# Altium PCB MicroCurrent.PcbDoc
Units mm, origin at the board's own origin, x right, y up, seen from the top; angles counter-clockwise.
Board outline 50 x 80 mm, 2 copper layers (Top, Bot); 36 components, 21 nets, 125 pads, 15 vias.
Unrouted connection lines stored in the file: 10.
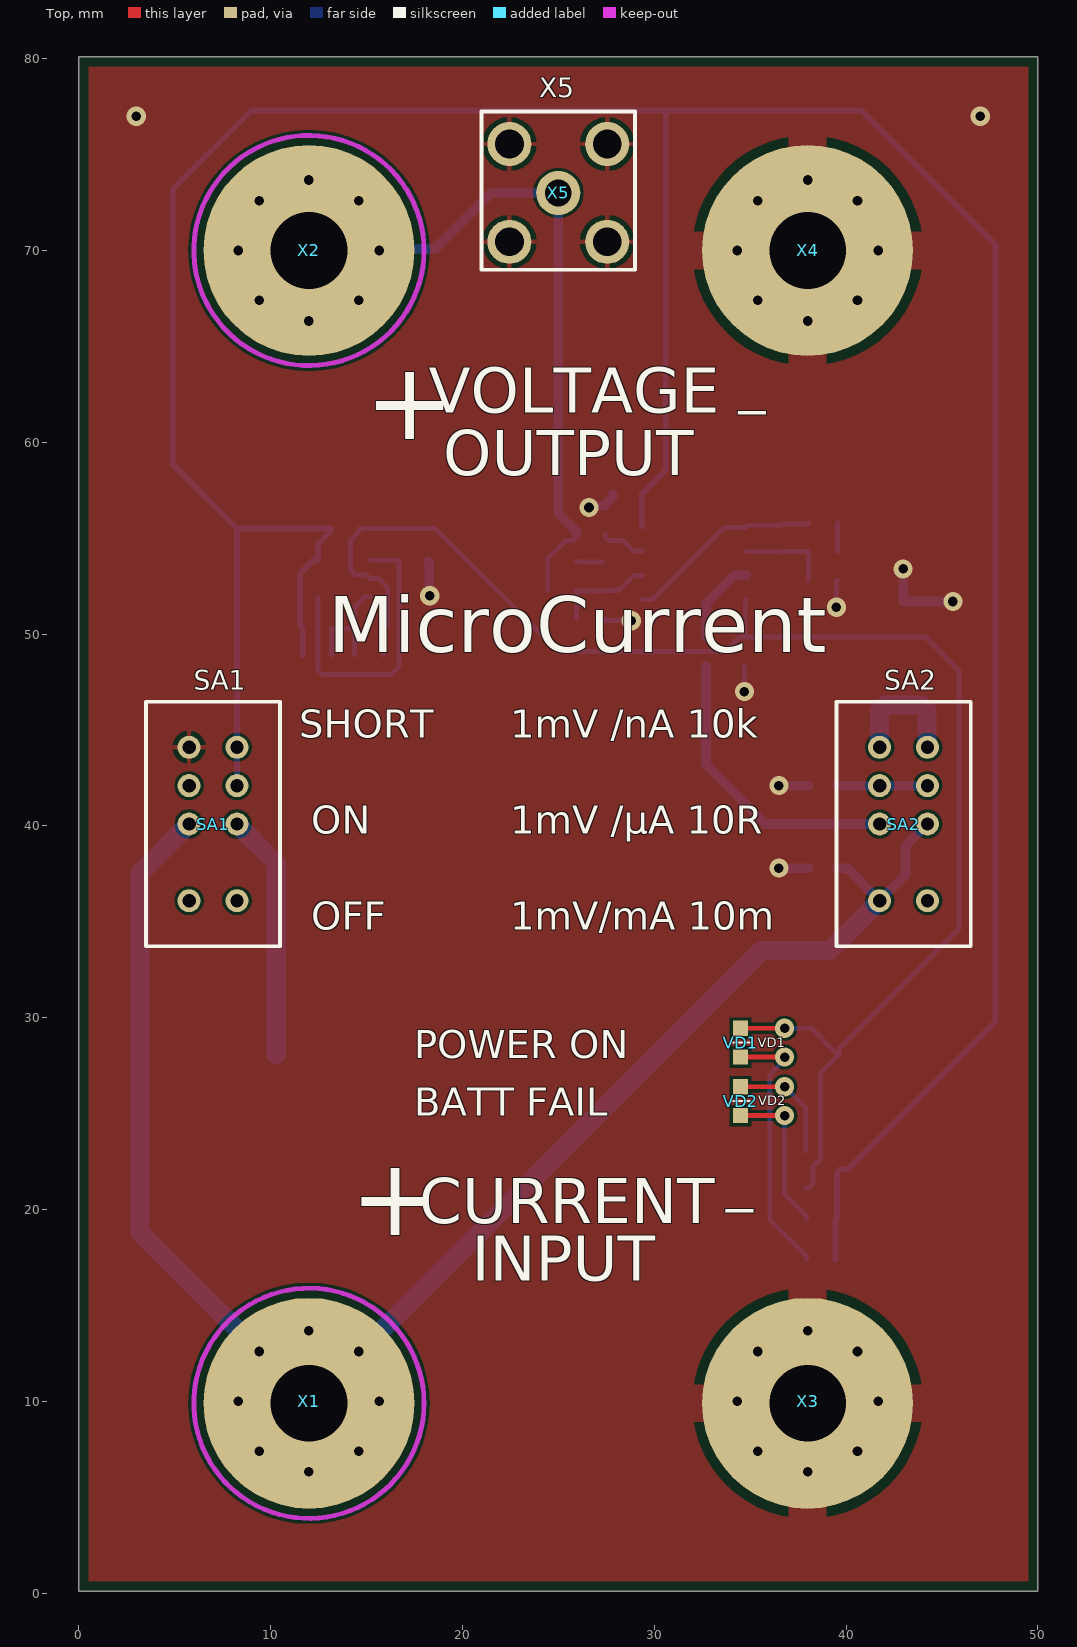
[diagram p0: Top view]
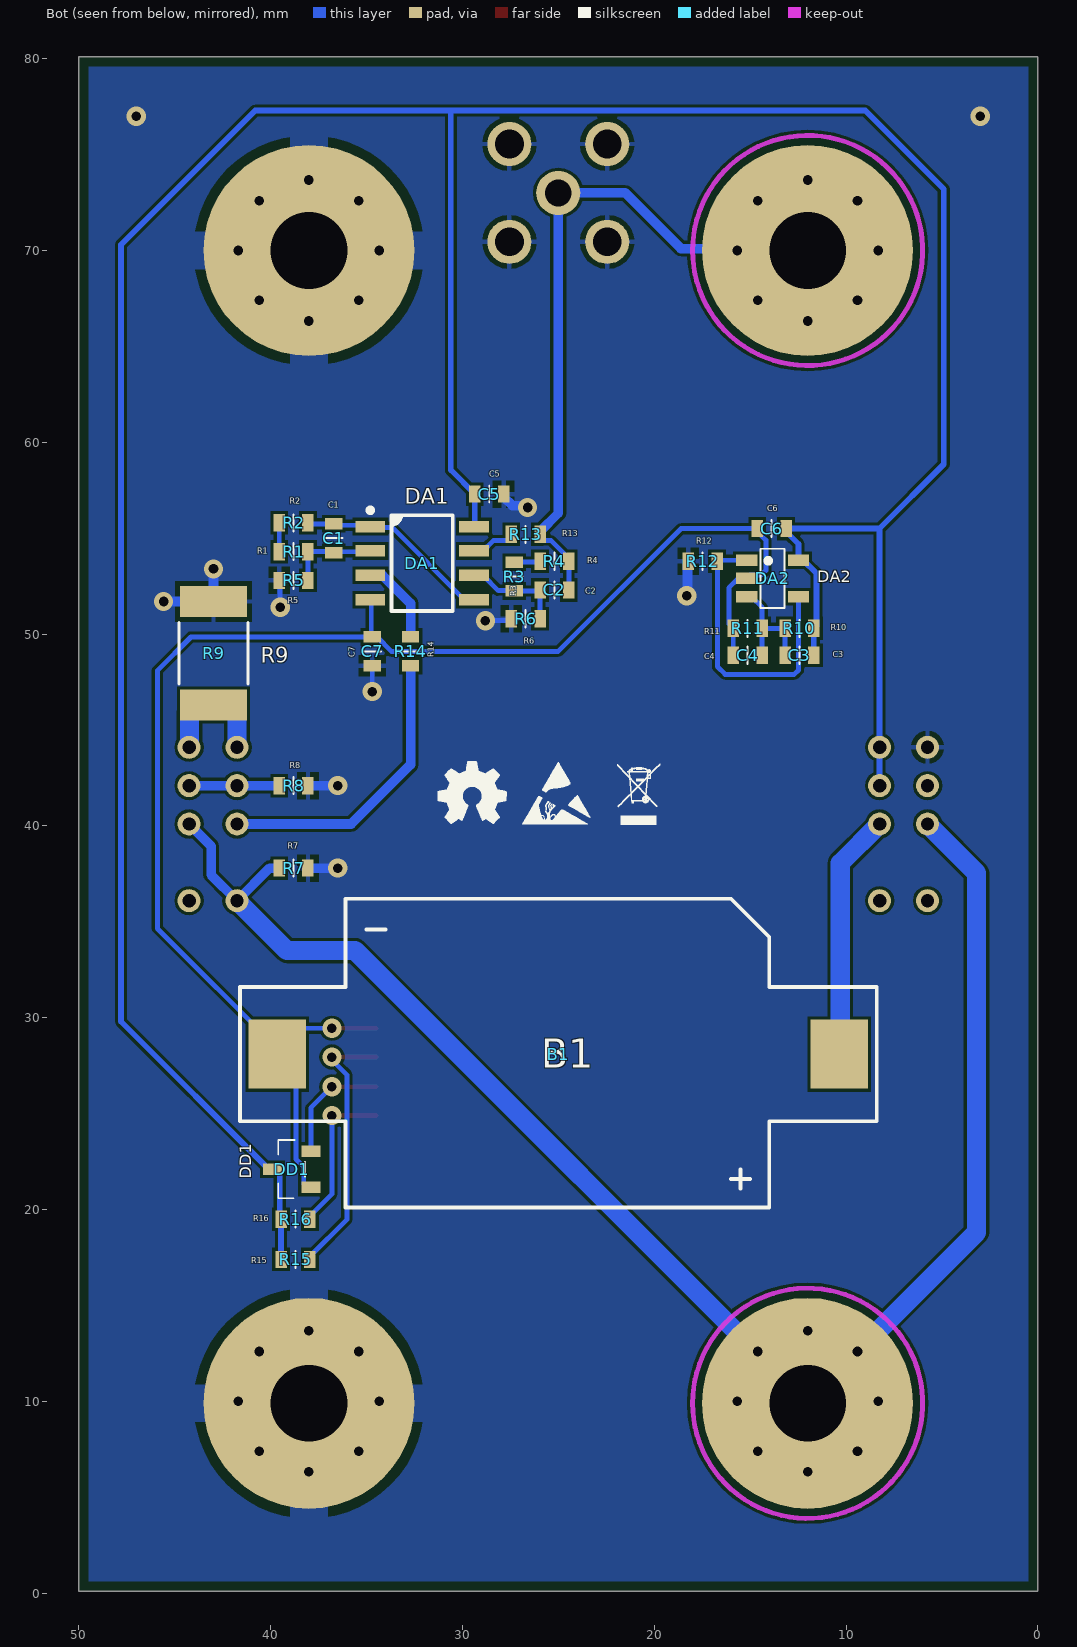
[diagram p1: Bot view, seen from below]
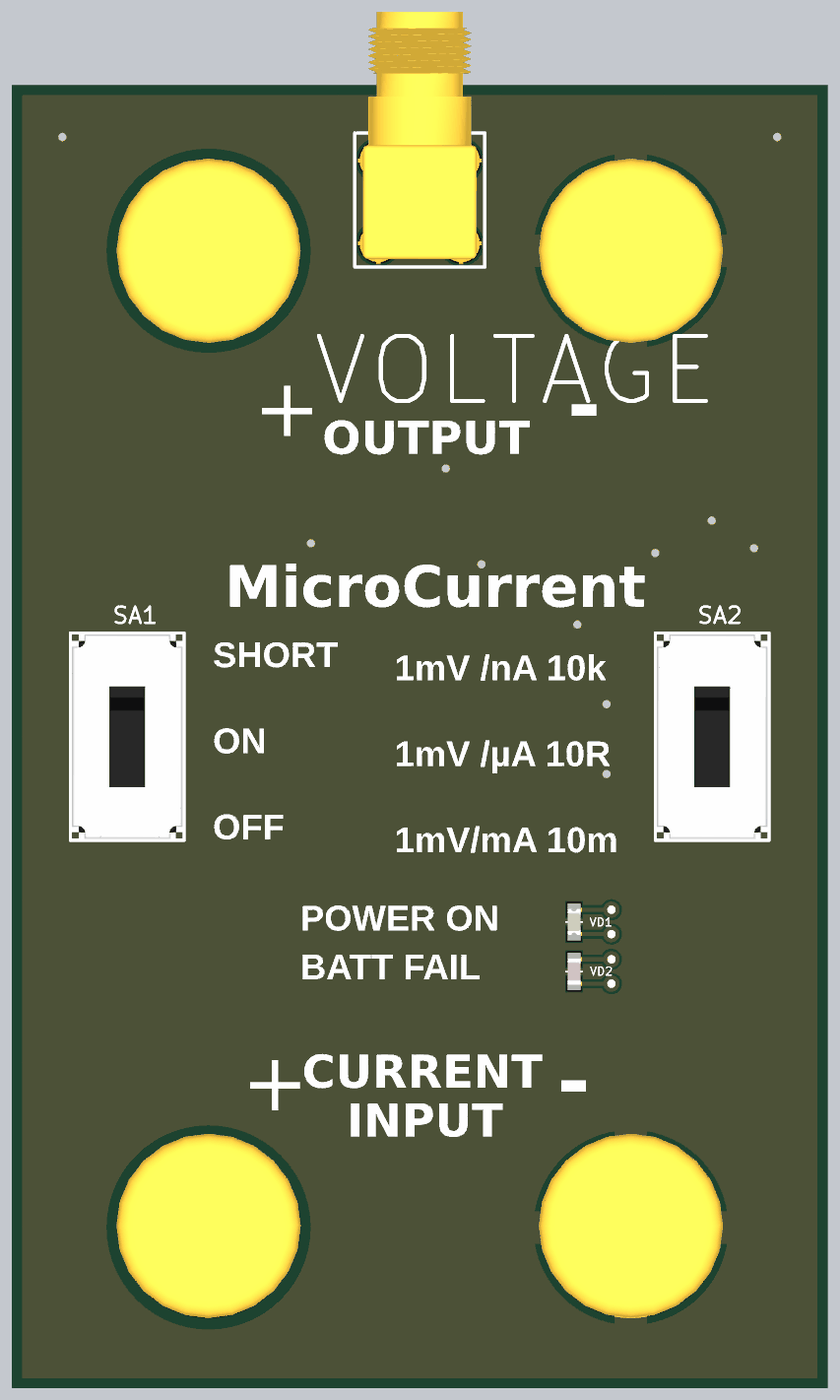
[diagram p2: 3D render of the assembled board from above, using the file's embedded part models]
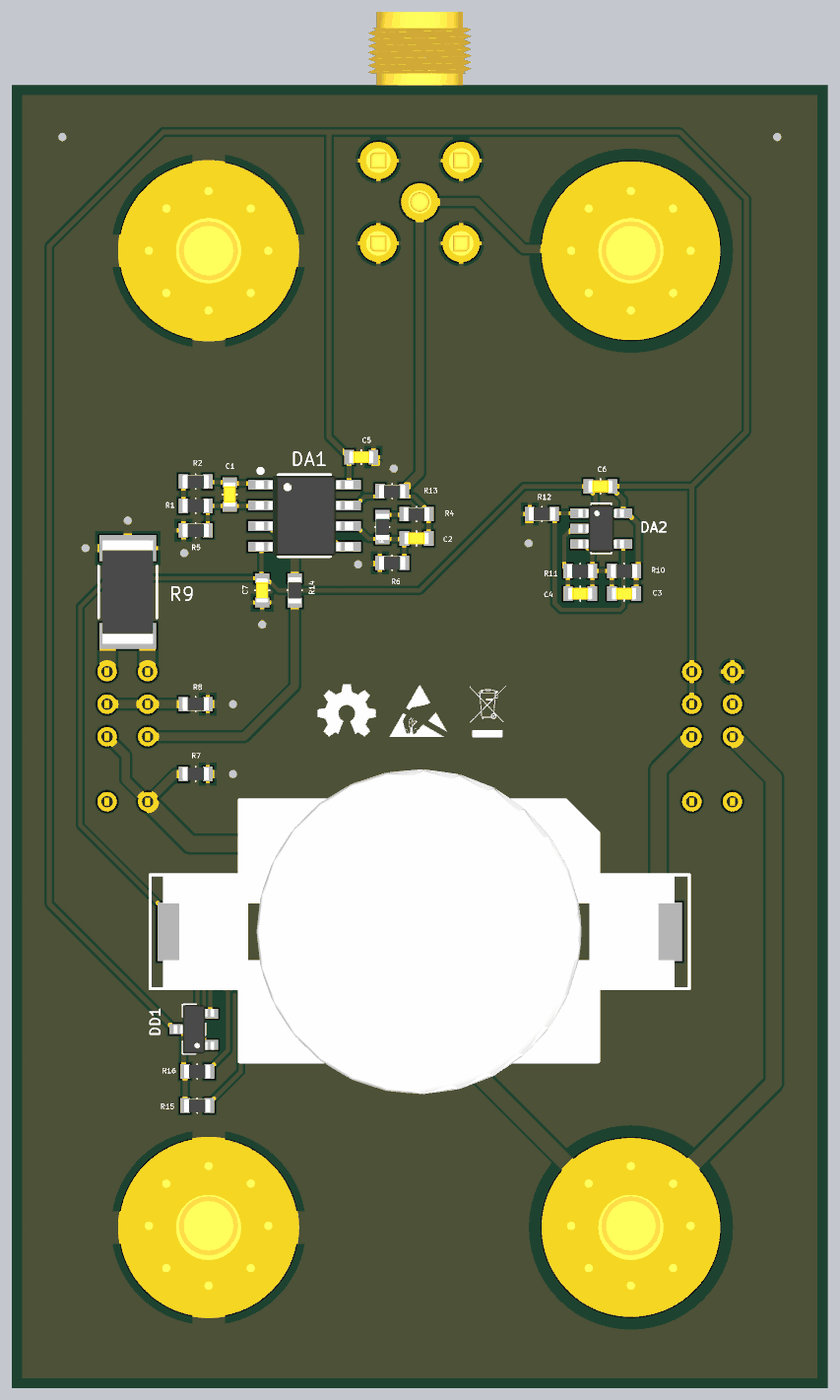
[diagram p3: 3D render of the assembled board from below, using the file's embedded part models]

## Layer stack, top to bottom
Top Solder: solder mask 0.0102, Solder Resist, Dk 3.5
Top: signal copper 0.0356
Dielectric 1: dielectric 0.32, FR-4, Dk 4.8
Bot: signal copper 0.0356
Bottom Solder: solder mask 0.0102, Solder Resist, Dk 3.5

## Board outline
0,0.1 0,80.1 50,80.1 50,0.1

## Design rules (kind name [scope] priority, off if disabled: settings)
BoardOutlineClearance [All] p1: gap=0.5 ignorepadtopadclearanceinfootprint=FALSE
Clearance ClearanceSilk [OnLayer('Top Silk') vs OnLayer('L1')] p1 off: gap=0.15 ignorepadtopadclearanceinfootprint=FALSE except(0: Arc-Hole Track-Hole SMDPad-Hole THPad-Hole Via-Hole Fill-Hole Poly-Hole Region-Hole Text-Hole)
Clearance Clearance_TOP&BOT_Layers [OnTopLayer Or OnBottomLayer] p2: gap=0.15 ignorepadtopadclearanceinfootprint=FALSE except(0: Arc-Hole Track-Hole SMDPad-Hole THPad-Hole Via-Hole Fill-Hole Poly-Hole Region-Hole Text-Hole)
Clearance Clearance_INT_Layers [(Not OnTopLayer) And (Not OnBottomLayer)] p3: gap=0.15 ignorepadtopadclearanceinfootprint=FALSE except(0: Arc-Hole Track-Hole SMDPad-Hole THPad-Hole Via-Hole Fill-Hole Poly-Hole Region-Hole Text-Hole)
Clearance ClearancePatds [InNet('In')] p4 off: gap=1 ignorepadtopadclearanceinfootprint=FALSE
Clearance [All] p5: gap=0.254 ignorepadtopadclearanceinfootprint=FALSE except(0: Arc-Hole Track-Hole SMDPad-Hole THPad-Hole Via-Hole Fill-Hole Poly-Hole Region-Hole Text-Hole)
HoleSize [All] p1: absolutevalues=TRUE maxlimit=5 minlimit=0.3 maxpercent=80.000 minpercent=20.000
MinimumSolderMaskSliver [All] p1 off: minsoldermaskwidth=0.254
PolygonConnect PolygonConnect_RTC5060185-black [HasFootprint('RTC5060185-black')] p1: connectstyle=Relief reliefconductorwidth=2 reliefentries=4 polygonreliefangle="90 Angle" airgapwidth=0.5
PolygonConnect PolygonConnect_Vias [(ObjectKind = 'Via')] p2: connectstyle=Direct reliefconductorwidth=0.254 reliefentries=4 polygonreliefangle="90 Angle" airgapwidth=0.254
PolygonConnect PolygonConnect_INT_Layers [(Not OnTopLayer) And (Not OnBottomLayer)] p3 off: connectstyle=Relief reliefconductorwidth=0.5 reliefentries=4 polygonreliefangle="90 Angle" airgapwidth=0.2
PolygonConnect PolygonConnect_TOPBOT_Layer [OnTopLayer Or OnBottomLayer] p4 off: connectstyle=Relief reliefconductorwidth=2 reliefentries=4 polygonreliefangle="90 Angle" airgapwidth=0.3
PolygonConnect [All] p5: connectstyle=Relief reliefconductorwidth=0.254 reliefentries=4 polygonreliefangle="90 Angle" airgapwidth=0.254
RoutingVias [All] p1: holewidth=0.5 width=1 viastyle="Through Hole" minholewidth=0.5 minwidth=1 maxholewidth=0.5 maxwidth=1
SilkToSolderMaskClearance [IsPad] p1 off: minsilkscreentomaskgap=0.254 clearancetoexposedcopper=TRUE
SolderMaskExpansion [All] p1: expansion=0.102
UnRoutedNet [All] p1: checkbadconnections=TRUE
Width [All] p1: maxlimit=5 minlimit=0.2 preferedwidth=0.3
26 further rules are at their usual default settings.

## Components (designator, comment, footprint, x,y, rotation, side; value= is the part's Value field where it differs from the comment)
B1 "CR2032" DS1092-10-W6L 25,28.1 r180 bottom locked
C1 "10p" C0603 36.7,55 r90 bottom
C2 "10p" C0603 25.2,52.3 r180 bottom
C3 "NC" C0603 12.425,48.9 r0 bottom
C4 "NC" C0603 15.125,48.9 r0 bottom
C5 "100n" C0603 28.6,57.3 r180 bottom
C6 "100n" C0603 13.875,55.5 r180 bottom
C7 "100n" C0603 34.7,49.1 r270 bottom
DA1 "MCP6022" "Microchip-SOIC8 SN" 32.1,53.7 r180 bottom
DA2 "MCP6001" "MICROCHIP-SOT-23-5 OT" 13.825,52.9 r180 bottom
DD1 "2.63V" MAXIM-SOT23-3L 38.9,22.1 r0 bottom
R1 "6k8" R0603 38.8,54.3 r0 bottom
R2 "2k2" R0603 38.8,55.8 r180 bottom
R3 "6k8" R0603 27.3,53 r90 bottom
R4 "2k2" R0603 25.2,53.8 r180 bottom
R5 "1k" R0603 38.8,52.8 r180 bottom
R6 "1k" R0603 26.7,50.8 r180 bottom
R7 "10k" R0603 38.8,37.8 r0 bottom
R8 "10R" R0603 38.8,42.1 r0 bottom
R9 "0R01" R2512 42.975,49 r270 bottom
R10 "100k" R0603 12.425,50.3 r180 bottom
R11 "100k" R0603 15.125,50.3 r180 bottom
R12 "270R" R0603 17.475,53.8 r0 bottom
R13 "270R" R0603 26.7,55.2 r180 bottom
R14 "270R" R0603 32.7,49.1 r90 bottom
R15 "1k" R0603 38.7,17.4 r180 bottom
R16 "1k" R0603 38.7,19.5 r180 bottom
SA1 "=Value" SS23D07 7,40.1 r270 top locked
SA2 "=Value" SS23D07 43,40.1 r270 top locked
VD1 "Green" "LTST-C191 GREEN" 34.5,28.7 r0 top
VD2 "Red" "LTST-C193 RED" 34.5,25.65 r0 top
X1 "Red" RTC5060185-RED#1 12,10 r0 top
X2 "Red" RTC5060185-RED#2 12,70 r0 top
X3 "Black" RTC5060185-BLACK#1 38,10 r0 top locked
X4 "Black" RTC5060185-BLACK#2 38,70 r0 top locked
X5 "Connector HF" SMA-11-TTG 25,73 r180 top

## Footprints (in the part's own frame and the unit in brackets; to place one, negate y for a bottom-side part, rotate by r counter-clockwise, add the part's x,y. Pads: shape width x height; smd on the part's side, far side on the other; paste and mask are expansions set on the pad)
C0603 [mm]
  rect 0.6x0.9 smd: 1(-0.75,0) 2(0.75,0)
  silkscreen extent 0,-0.45 0,0.45, body extent -0.76,-0.38 0.76,0.38, height 0.76
DS1092-10-W6L [mm]
  rect 3x3.6 smd: 1(14.65,0) 2(-14.65,0)
  silkscreen extent -16.6,-8 16.6,8.1, body extent -15.8,-10 15.7,10, height 5.5
"LTST-C191 GREEN" [mm]
  rect 0.8x0.8 smd: 1(0,0.75) 2(0,-0.75)
  silkscreen extent -0.5,0 0.5,0, body extent -0.4,-0.8 0.4,0.8, height 0.56
"LTST-C193 RED" [mm]
  rect 0.8x0.8 smd: 1(0,0.75) 2(0,-0.75)
  silkscreen extent -0.5,0 0.5,0, body extent -0.4,-0.8 0.4,0.8, height 0.36
MAXIM-SOT23-3L [mm]
  rect 1x0.6 smd: 1(-1,0.95) 2(-1,-0.95) 3(1,0)
  silkscreen extent -0.7,-1.52 0.7,1.51, body extent -1.24,-1.5 1.25,1.5, height 1.2
"Microchip-SOIC8 SN" [mm]
  rect 1.55x0.6 smd: 1(-2.7,1.905) 2(-2.7,0.635) 3(-2.7,-0.635) 4(-2.7,-1.905) 5(2.7,-1.905) 6(2.7,-0.635) 7(2.7,0.635) 8(2.7,1.905)
  silkscreen extent -2.83,-2.5 1.6,2.88, body extent -3,-2.45 3,2.45, height 1.36
"MICROCHIP-SOT-23-5 OT" [mm]
  rect 1.1x0.6 smd: 1(-1.35,0.95) 2(-1.35,0) 3(-1.35,-0.95) 4(1.35,-0.95) 5(1.35,0.95)
  silkscreen extent -0.63,-1.53 0.63,1.55, body extent -1.4,-1.45 1.4,1.45, height 1.46
R0603 [mm] "Chip Resistor, 2-Leads, Body 1.60x0.80mm, IPC Medium Density"
  rect 0.6x0.9 smd: 1(-0.75,0) 2(0.75,0)
  silkscreen extent 0,-0.45 0,0.45, body extent -0.8,-0.42 0.8,0.4, height 0.46
R2512 [mm]
  rect 1.6x3.5 smd: 1(-2.7,0) 2(2.7,0)
  silkscreen extent -1.6,-1.8 1.6,1.8, body extent -3.18,-1.55 3.18,1.55, height 0.55
RTC5060185-BLACK#1 [mm]
  round 0 hole 0.5 mask+0.075: 1(-3.675,0) 1(-2.599,-2.599) 1(-2.599,2.599) 1(0,-3.675) 1(0,3.675) 1(2.599,-2.599) 1(2.599,2.599) 1(3.675,0)
  round 11 hole 4 mask+0.075: 1(0,-0.1)
  body extent -5.67,-5.67 5.67,5.67, height 15
RTC5060185-BLACK#2 [mm]
  round 0 hole 0.5 mask+0.075: 1(-3.675,0) 1(-2.599,-2.599) 1(-2.599,2.599) 1(0,-3.675) 1(0,3.675) 1(2.599,-2.599) 1(2.599,2.599) 1(3.675,0)
  round 11 hole 4 mask+0.075: 1(0,0)
  body extent -5.67,-5.67 5.67,5.67, height 15
RTC5060185-RED#1 [mm]
  round 0 hole 0.5 mask+0.075: 1(-3.675,0) 1(-2.599,-2.599) 1(-2.599,2.599) 1(0,-3.675) 1(0,3.675) 1(2.599,-2.599) 1(2.599,2.599) 1(3.675,0)
  round 11 hole 4 mask+0.075: 1(0,-0.1)
  body extent -5.67,-5.67 5.67,5.67, height 15
RTC5060185-RED#2 [mm]
  round 0 hole 0.5 mask+0.075: 1(-3.675,0) 1(-2.599,-2.599) 1(-2.599,2.599) 1(0,-3.675) 1(0,3.675) 1(2.599,-2.599) 1(2.599,2.599) 1(3.675,0)
  round 11 hole 4 mask+0.075: 1(0,0)
  body extent -5.67,-5.67 5.67,5.67, height 15
SMA-11-TTG [mm]
  round 2.3 hole 1.4 paste+1 mask+0.1: 1(0,0)
  round 2.3 hole 1.5 paste+1 mask+0.1: 2(-2.55,2.55) 2(-2.55,-2.55) 2(2.55,2.55) 2(2.55,-2.55)
  silkscreen extent -4,-4.25 4,4, body extent -3.5,-11.7 3.5,3.5, height 10.1
SS23D07 [mm]
  round 1.2 hole 0.7: 1.1(4,1.25) 1.2(4,-1.25) 2.1(0,1.25) 2.2(0,-1.25) 3.1(-2,1.25) 3.2(-2,-1.25) 4.1(-4,1.25) 4.2(-4,-1.25)
  silkscreen extent -6.38,-3.5 6.38,3.5, body extent -6.3,-3.4 6.3,3.4, height 8.7

## Part data
B1: library part DS-1092-10-W6L, "CR2032 SMD battery holder", Component Name=DS-1092-10-W6L, HelpURL=https://static.chipdip.ru/lib/011/DOC004011758.pdf, Part Number=DS-1092-10-W6L, Pins=2, Vendor=Connfly
C1 C2: library part "C0603 10p 100V C0G 125°C ±0.5pF", "Commercial Grade Mid Voltage (100 to 630V) ceramic capacitor", Dielectric=C0G, Package=C0603, Part Number=C1608C0G2A100D080AA, Temperature="-55 to +125°C", Tolerance=±0.5pF, Voltage=100V, Component Name="C0603 10p 100V C0G 125°C ±0.5pF", HelpURL=https://product.tdk.com/en/search/capacitor/ceramic/mlcc/info?part_no=C1608C0G2A100D080AA, Pins=2, Vendor=TDK
C3 C4: library part "NC 0603 Cap", "NC 0603 Capasitor", Package=C0603, Component Name="NC 0603 Cap", Pins=2, Price=0
C5 C6 C7: library part "C0603 100n 100V X7R 125°C ±20%", "General  ceramic capacitor", Dielectric=X7R, Package=C0603, Part Number=GRM188R72A104MA35#, Temperature=125°C, Tolerance=±20%, Voltage=100V, Component Name="C0603 100n 100V X7R 125°C ±20%", HelpURL=https://psearch.en.murata.com/capacitor/result/smd/?pid=GRM188R72A104MA35#, Pins=2, Vendor=Murata
DA1: library part "MCP6022xI SN", "OpAmp Low offset Low Vcc", Package=SOIC8, Part Number=MCP6022x, Component Name="MCP6022xI SN", HelpURL=https://static.chipdip.ru/lib/355/DOC004355419.pdf, Pins=8, Vendor=Microchip
DA2: library part "MCP6001xI OT", "Low-Power Op Amp", Package=SOT-23-5, Component Name="MCP6001xI OT", HelpURL=https://static.chipdip.ru/lib/174/DOC001174516.pdf, Part Number="MCP6001xI OT", Pins=5, Vendor=Microchip
DD1: library part MAX809REUR, "Microprocessor Reset Circuit", Package=SOT-23, Part Number=MAX809REUR+T, Component Name=MAX809REUR, HelpURL=https://static.chipdip.ru/lib/235/DOC000235341.pdf, Pins=3, Vendor=Maxim
R1 R3: library part "R0603 6k8 ±1% E24", "Thick Film Chip Resistor - CR Series", Package=R0603, Part Number=CR-03FL7---6k8, Power=1/10W, Tolerance=±1%, Voltage=75V, Alt Part="RTT036801FTH (Ralec)", Component Name="R0603 6k8 ±1% E24", HelpURL=https://www.viking.com.tw/en/search/index.html?f%5Bname_model%5D=CR-03FL7---6k8&type=product, Pins=2, Price=0.001, Vendor=Viking
R2 R4: library part "R0603 2k2 ±1% E24", "Thick Film Chip Resistor - CR Series", Package=R0603, Part Number=CR-03FL7---2k2, Power=1/10W, Tolerance=±1%, Voltage=75V, Alt Part="RTT032201FTH (Ralec)", Component Name="R0603 2k2 ±1% E24", HelpURL=https://www.viking.com.tw/en/search/index.html?f%5Bname_model%5D=CR-03FL7---2k2&type=product, Pins=2, Price=0.001, Vendor=Viking
R5 R6 R15 R16: library part "R0603 1k ±1% E24", "Thick Film Chip Resistor - CR Series", Package=R0603, Part Number=CR-03FL7----1k, Power=1/10W, Tolerance=±1%, Voltage=75V, Alt Part="RTT031001FTH (Ralec)", Component Name="R0603 1k ±1% E24", HelpURL=https://www.viking.com.tw/en/search/index.html?f%5Bname_model%5D=CR-03FL7----1k&type=product, Pins=2, Price=0.001, Vendor=Viking
R7: library part "R0603 10k ±1% E24", "Thick Film Chip Resistor - CR Series", Package=R0603, Part Number=CR-03FL7---10k, Power=1/10W, Tolerance=±1%, Voltage=75V, Alt Part="RTT031002FTH (Ralec)", Component Name="R0603 10k ±1% E24", HelpURL=https://www.viking.com.tw/en/search/index.html?f%5Bname_model%5D=CR-03FL7---10k&type=product, Pins=2, Price=0.001, Vendor=Viking
R8: library part "R0603 10R ±1% E24", "Thick Film Chip Resistor - CR Series", Package=R0603, Part Number=CR-03FL7---10R, Power=1/10W, Tolerance=±1%, Voltage=75V, Alt Part="RTT03100FTH (Ralec)", Component Name="R0603 10R ±1% E24", HelpURL=https://www.viking.com.tw/en/search/index.html?f%5Bname_model%5D=CR-03FL7---10R&type=product, Pins=2, Price=0.001, Vendor=Viking
R9: library part "R2512 1R ±1% E24", "Thick Film Chip Resistor - CR Series", Package=R2512, Part Number=CR-12FL4----1R, Power=1W, Tolerance=±1%, Voltage=250V, Alt Part="RTT251R0FTH (Ralec)", Component Name="R2512 1R ±1% E24", HelpURL=https://www.viking.com.tw/en/search/index.html?f%5Bname_model%5D=CR-12FL4----1R&type=product, Pins=2, Price=0.001, Vendor=Viking
R10 R11: library part "R0603 100k ±1% E24", "Thick Film Chip Resistor - CR Series", Package=R0603, Part Number=CR-03FL7--100k, Power=1/10W, Tolerance=±1%, Voltage=75V, Alt Part="RTT031003FTH (Ralec)", Component Name="R0603 100k ±1% E24", HelpURL=https://www.viking.com.tw/en/search/index.html?f%5Bname_model%5D=CR-03FL7--100k&type=product, Pins=2, Price=0.001, Vendor=Viking
R12 R13 R14: library part "R0603 270R ±1% E24", "Thick Film Chip Resistor - CR Series", Package=R0603, Part Number=CR-03FL7--270R, Power=1/10W, Tolerance=±1%, Voltage=75V, Alt Part="RTT032700FTH (Ralec)", Component Name="R0603 270R ±1% E24", HelpURL=https://www.viking.com.tw/en/search/index.html?f%5Bname_model%5D=CR-03FL7--270R&type=product, Pins=2, Price=0.001, Vendor=Viking
SA1 SA2: library part SS23D07
VD1: library part "0603 0h55 5mA GREEN KGKT", "TopView Single Color Chip LED", Current=5mA, Package="0603 0h55", Part Number=LTST-C191KGKT-5A, Brightness="4.5-18.0 @ 5mA", Component Name="0603 0h55 5mA GREEN KGKT", HelpURL=http://optoelectronics.liteon.com/en-global/Led/LED-Component/Detail/448?param4=1, Pins=2, Vendor=Lite-On, WaveLength="564.5-573.5 @5mA"
VD2: library part "0603 0h35 5mA RED KRKT", "TopView Single Color Chip LED", Current=5mA, Package="0603 0h35", Part Number=LTST-C193KRKT-5A, Brightness="7.1~45 @ 5mA", Component Name="0603 0h35 5mA RED KRKT", HelpURL=http://optoelectronics.liteon.com/en-global/Led/LED-Component/Detail/448?param4=1, Pins=2, Vendor=Lite-On, WaveLength="631 @ 5mA"
X1 X2: library part RTC5060185-red, Component Name=RTC5060185-red, Part Number=RTC5060185-red, Pins=1
X3 X4: library part RTC5060185-black, Component Name=RTC5060185-black, Part Number=RTC5060185-black, Pins=1
X5: library part SMA-11-TTG, "angle sma connector", Component Name=SMA-11-TTG, HelpURL=https://www.chipdip.ru/product/sma-11-tgg, Part Number=SMA-11-TTG, Pins=2, Vendor=Nus-Tsan

## Via types
v1: diameter 1, hole 0.5, Top to Bot, tented both sides, 15 vias

## Nets (pads, with @x,y where several pads share a name; then routed paths per layer and width w, separated by ;. In a path a pad name is that pad's centre, name@x,y a point inside that pad or via, vN(x,y) a via of type N, cw(c..) or ccw(c..) an arc to the next point about the centre after c; other vN are vias at no path point)
+V: C3.1 C5.1 C6.2 DA1.8 DA2.5 DD1.3 R10.2 R15.1 R16.1 SA1.3.1 SA1.4.1 | length 171.1
  Bot w0.3: SA1.3.1 SA1.4.1 8.25,55.5 ; C3.1 R10.2 11.544,50.431 11.544,53.169 12.225,53.85 DA2.5 12.475,54.7 13.125,55.35 C6.2 8.25,55.5 ; DA1.8 29.35,55.655 C5.1 30.6,58.55 30.6,77.3 ; R15.1 R16.1 39.527,19.577 39.527,21.927 39.7,22.1 DD1.3 40.1,22.1 47.8,29.8 47.8,70.3 40.8,77.3 30.6,77.3 ; 8.25,55.5 4.9,58.85 4.9,73.2 9,77.3 30.6,77.3
-V: B1.2 C4.2 C6.1 C7.1 DA1.4 DA2.2 DD1.1 R11.1 VD1.1 | length 81.1
  Top w0.254: VD1.1 v1(36.8,29.45)
  Bot w0.254: C4.2 R11.1 16.106,50.531 16.106,52.408 15.614,52.9 DA2.2 15.002,53.073 14.427,53.073 14.175,53.325 14.175,54.9 14.625,55.35 C6.1 18.6,55.5 25,49.1 33.7,49.1 34.45,49.85 C7.1 ; DA1.4 34.75,51.745 34.75,49.9 C7.1 ; v1(36.8,29.45) 38.2,29.45 B1.2@39.45,28.2 ; DD1.1 38.1,21.15 38.273,21.323 38.273,22.231 38.677,22.635 38.677,27.127 B1.2 39.65,28.4 45.9,34.65 45.9,48.1 44.15,49.85 C7.1
GND: C5.2 C7.2 R5.1 R6.1 R7.1 R8.1 R9.1 R12.2 SA1.4.2 X3.1 X4.1 X5.2 | length 15.2
  Bot w0.254: R6.1 27.45,50.65 27.5,50.7 v1(28.8,50.7) ; v1(34.7,47) C7.2 ; v1(39.5,51.4) 39.5,52.75 R5.1
  Bot w0.5: R12.2 18.263,53.763 18.263,52.037 v1(18.3,52) ; v1(26.6,56.6) 26.696,56.696 27.396,56.696 27.85,57.15 C5.2 ; v1(36.5,37.8) R7.1 ; v1(36.5,42.1) R8.1 ; v1(42.975,53.4) R9.1 v1(45.575,51.7)
  other v1: 3,77 47,77
In: R7.2 SA1.2.2 SA2.1.2 SA2.2.1 X1.1 | length 83.1
  Bot w0.5: R7.2 40.05,37.8 SA2.1.2 43.1,37.45 43.1,38.95 SA2.2.1
  Bot w1: SA1.2.2 3.2,37.55 3.2,18.8 9.301,12.699 X1.1@12.901,12.699 ; X1.1@12,9.9 35.6,33.5 39.15,33.5 SA2.1.2
NetB1_1: B1.1 SA1.2.1 | length 12.8
  Bot w1: SA1.2.1 10.3,38.05 B1.1@10.3,28.1
NetC1_1: C1.1 DA1.2 R1.1 R5.2 | length 4.8
  Bot w0.254: DA1.2 34.843,54.292 36.657,54.292 C1.1 36.75,54.3 R1.1 R5.2
NetC1_2: C1.2 DA1.1 DA1.5 R2.2 | length 10.3
  Bot w0.254: DA1.5 29.895,51.795 33.664,55.564 34.759,55.564 DA1.1 34.873,55.677 36.628,55.677 C1.2 38,55.75 R2.2
NetC2_1: C2.1 DA1.6 R3.1 R6.2 | length 5.3
  Bot w0.254: R6.2 C2.1 26,52.25 R3.1 27.321,52.271 28.131,52.271 28.925,53.065 DA1.6
NetC3_2: C3.2 C4.1 DA2.3 R10.1 R11.2 | length 6.1
  Bot w0.254: C3.2 R10.1 R11.2 ; C4.1 R11.2 ; DA2.3 14.925,51.95 14.375,51.4 R11.2
NetDA1_3: DA1.3 R14.2 | length 4.5
  Bot w0.5: R14.2 32.7,51.6 34.165,53.065 DA1.3
NetDA1_7: DA1.7 R13.1 | length 2.4
  Bot w0.254: R13.1 27.45,55.05 27.623,54.877 28.383,54.877 28.925,54.335 DA1.7
NetDA2_1: DA2.1 DA2.4 R12.1 | length 15.4
  Bot w0.254: DA2.4 12.475,48.125 12.7,47.9 16.3,47.9 16.7,48.3 16.7,53.775 R12.1 16.675,53.85 DA2.1
NetDD1_2: DD1.2 VD2.1 | length 6.1
  Top w0.254: VD2.1 v1(36.8,26.4)
  Bot w0.254: v1(36.8,26.4) 37.9,25.3 DD1.2
NetR1_2: R1.2 R2.1 | length 1.5
  Bot w0.254: R1.2 R2.1
NetR3_2: R3.2 R4.1 | length 1.4
  Bot w0.254: R4.1 26,53.75 R3.2
NetR8_2: R8.2 SA2.3.1 SA2.3.2 | length 4.7
  Bot w0.5: R8.2 SA2.3.1
NetR9_2: R9.2 SA2.4.1 SA2.4.2 | length 6.5
  Bot w1: SA2.4.2 41.75,46 42.05,46.3 43.925,46.3 44.225,46 44.225,44.125 SA2.4.1
NetR14_1: R14.1 SA2.2.2 | length 15.5
  Bot w0.5: R14.1 32.7,43.2 35.8,40.1 SA2.2.2
NetR15_2: R15.2 VD1.2 | length 14
  Top w0.254: VD1.2 v1(36.8,27.95)
  Bot w0.254: v1(36.8,27.95) 36.8,27.8 36.023,27.023 36.023,19.477 37.95,17.55 R15.2
NetR16_2: R16.2 VD2.2 | length 8.2
  Top w0.254: VD2.2 v1(36.8,24.9)
  Bot w0.254: v1(36.8,24.9) 36.8,20.8 37.95,19.65 R16.2
Out: C2.2 R4.2 R13.2 X2.1 X5.1 | length 36.2
  Bot w0.254: C2.2 R4.2 24.45,53.95 25.377,54.877 25.777,54.877 25.95,55.05 R13.2
  Bot w0.5: X2.1@12.05,70.05 12,70.1 15.675,70.1 18.6,70.1 21.5,73 X5.1 25,56.3 25.95,55.35 R13.2
pads on no net: SA1.1.1 SA1.1.2 SA1.3.2 SA2.1.1

## Polygon pours and split planes (outlines as drawn)
GND on Top "Top Layer-No Net" (solid, remove dead copper, pour order 0): 0,0.075 0,80.1 50,80.1 50,0.075
GND on Bot "Bot-GND" (solid, remove dead copper, pour order 4): 0,0.2 0,80.1 50,80.1 50,0.1

## Keep-outs
Keep-Out Layer:
  circle w0.254: c12,9.9 r6
  circle w0.254: c12,70 r6

## Silkscreen, mask and mechanical layers (free items; w line width, h text height)
Top Overlay:
  text "VOLTAGE" at 18.25,60.75 h4
  text "+" at 14.9,58.8 h7
  text "-" at 34.1,58.8 h7
  text "OUTPUT" at 19,57.5 h4
  text "MicroCurrent" at 13,48.1 h5
  text "SHORT /  /  ON /  /  OFF" at 11.5,34.1 h2.5
  text "1mV /nA 10k /  / 1mV /µA 10R /  / 1mV/mA 10m" at 22.5,34.1 h2.5
  text "POWER ON" at 17.5,27.4 h2.5
  text "BATT FAIL" at 17.5,24.4 h2.5
  text "CURRENT" at 17.75,18.5 h4
  text "+" at 14.15,17.3 h7
  text "-" at 33.45,17.2 h7
  text "INPUT" at 20.5,15.5 h4
Bottom Overlay:
  drawing of 1704 lines, arcs and shapes, not listed
Board:
  the board outline again, w0.2